# Altium PCB PCB1.PcbDoc
Units mil, origin at the board's own origin, x right, y up, seen from the top; angles counter-clockwise.
Board outline 6000 x 4000 mil, 2 copper layers (Top Layer, Bottom Layer); 48 components, 34 nets, 216 pads, 0 vias.
Unrouted connection lines stored in the file: 59.
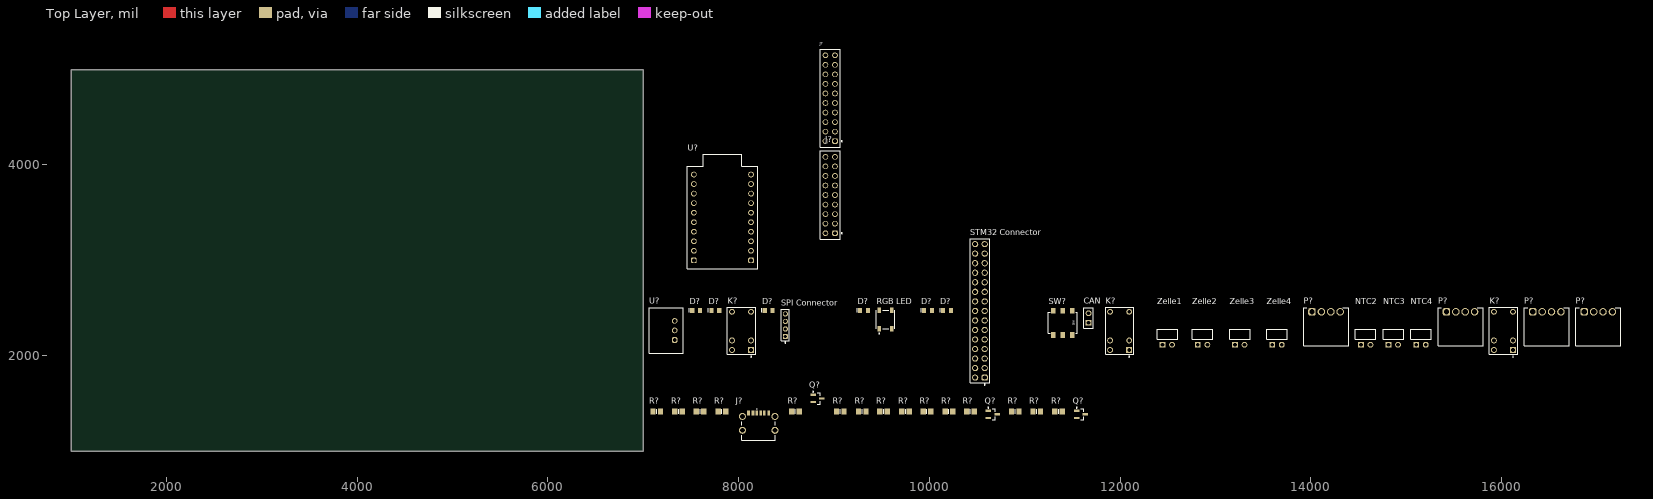
[diagram p0: Top Layer view]
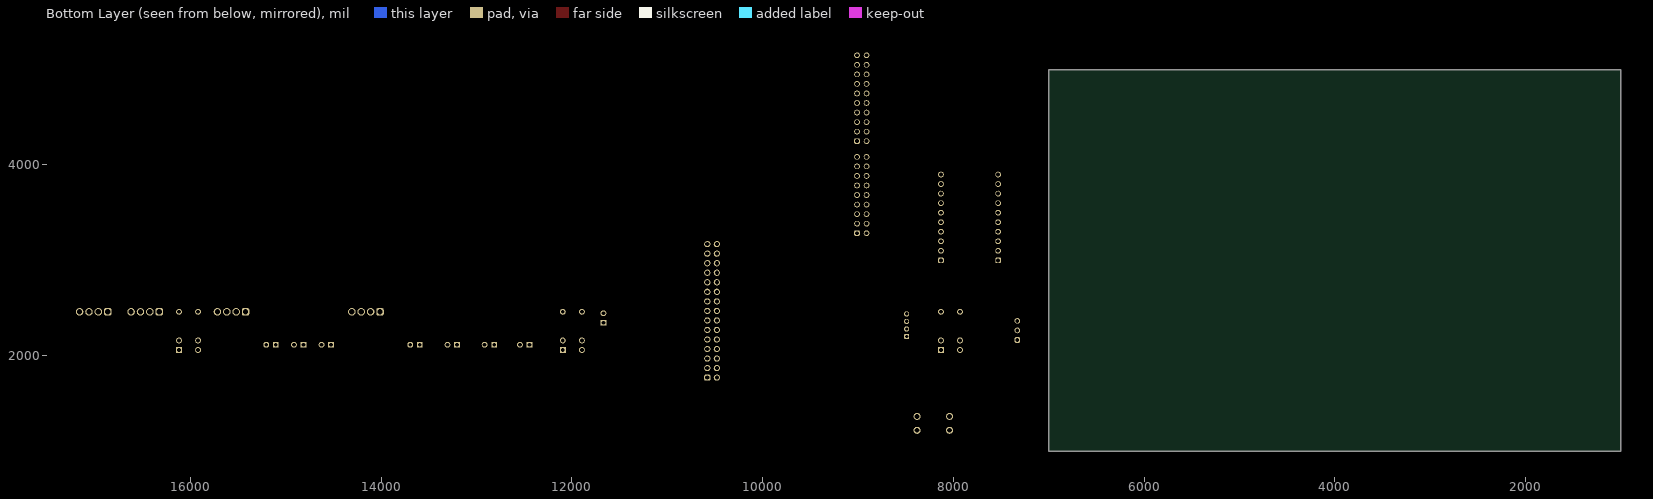
[diagram p1: Bottom Layer view, seen from below]

## Layer stack, top to bottom
Top Solder: solder mask 0.4, Solder Resist, Dk 3.5
Top Layer: signal copper 1.4
Dielectric 1: dielectric 12.6, FR-4, Dk 4.8
Bottom Layer: signal copper 1.4
Bottom Solder: solder mask 0.4, Solder Resist, Dk 3.5

## Board outline
1000,1000 7000,1000 7000,5000 1000,5000

## Design rules (kind name [scope] priority, off if disabled: settings)
Clearance [All] p1: gap=10 ignorepadtopadclearanceinfootprint=FALSE
PolygonConnect [All] p1: connectstyle=Relief reliefconductorwidth=10 reliefentries=4 polygonreliefangle="90 Angle" airgapwidth=10
RoutingVias [All] p1: holewidth=28 width=50 viastyle="Through Hole" minholewidth=28 minwidth=50 maxholewidth=28 maxwidth=50
SolderMaskExpansion [All] p1: expansion=4 istentingtop=FALSE
SupplyNets "Schematic Supply Nets_4" [InNet('3V3')] p1: voltage=0.000
SupplyNets "Schematic Supply Nets_3" [InNet('+5')] p2: voltage=0.000
SupplyNets "Schematic Supply Nets_2" [InNet('GND')] p3: voltage=0.000
SupplyNets "Schematic Supply Nets_1" [InNet('+5V')] p4: voltage=0.000
SupplyNets "Schematic Supply Nets" [InNet('+3.3V')] p5: voltage=0.000
Width [All] p1: maxlimit=10 minlimit=10 preferedwidth=10
30 further rules are at their usual default settings.

## Classes and differential pairs
component class MiniBMS: C1 C2 C3 C4 F? R1 R2 R3 R4 R5 R6 R7 R8 R9 R10 R11 R12 R13 R14 R15 R16

## Components (designator, comment, footprint, x,y, rotation, side; value= is the part's Value field where it differs from the comment)
CAN "TSW-102-26-G-S" SMTC-TSW-102-26-XX-S 11670,2345 r90 top
D? "150080AS75000" WL-SMCW_0805_150080xx75000 7755,2475 r0 top
D? "150080BS75000" WL-SMCW_0805_150080xx75000 9985,2475 r0 top
D? "150080BS75000" WL-SMCW_0805_150080xx75000 9315,2475 r0 top
D? "150080RS75000" WL-SMCW_0805_150080xx75000 8315,2475 r0 top
D? "150080BS75000" WL-SMCW_0805_150080xx75000 10185,2475 r0 top
D? "150080GS75000" WL-SMCW_0805_150080xx75000 7555,2475 r0 top
J? "61302021821" 61302021821 8960,4700 r90 top
J? "61301821821" 61301821821 8960,3685 r90 top
J? "632722100213" 632722100213 8210,1255 r0 top
K? "G5V-1-DC5" FP-G5V-1-MFG 11995,2260 r90 top
K? "G5V-1-DC5" FP-G5V-1-MFG 8030,2260 r90 top
K? "G5V-1-DC5" FP-G5V-1-MFG 16020,2260 r90 top
NTC2 "TSW-102-22-G-S-RA" SMTC-TSW-102-22-X-S-RA 14525,2115 r0 top
NTC3 "TSW-102-22-G-S-RA" SMTC-TSW-102-22-X-S-RA 14815,2115 r0 top
NTC4 "TSW-102-22-G-S-RA" SMTC-TSW-102-22-X-S-RA 15105,2115 r0 top
P? "691382010004" 691382010004 15570,2305 r0 top
P? "691382010004" 691382010004 14160,2305 r0 top
P? "691382010004" 691382010004 16475,2305 r0 top
P? "691382010004" 691382010004 17015,2305 r0 top
Q? "NMOS; 40V, 3,6A" SOT-23_M 11590,1385 r0 top
Q? "NMOS; 40V, 3,6A" SOT-23_M 8826.26,1552.4 r0 top
Q? "NMOS; 40V, 3,6A" SOT-23_M 10665,1385 r0 top
R? "Res100" 6-0805_M 11355,1415 r0 top value=100
R? "Res330,0805" 6-0805_M 9065,1415 r0 top value=330
R? "Res100" 6-0805_M 8595,1415 r0 top value=100
R? "Res100,0805" 6-0805_M 9520,1415 r0 top value=100
R? "Res5k1,0805" 6-0805_M 7140,1415 r0 top value=5k1
R? "Res10K" 6-0805_M 11125,1415 r0 top value=10K
R? "Res100,0805" 6-0805_M 9750,1415 r0 top value=100
R? "Res5" 6-0805_M 10900,1415 r0 top value=5
R? "Res100" 6-0805_M 10430,1415 r0 top value=100
R? "Res100,0805" 6-0805_M 7825,1415 r0 top value=100
R? "Res5k1,0805" 6-0805_M 7370,1415 r0 top value=5k1
R? "Res10K" 6-0805_M 9975,1415 r0 top value=10K
R? "Res10K" 6-0805_M 7595,1415 r0 top value=10K
R? "Res330,0805" 6-0805_M 9295,1415 r0 top value=330
R? "Res100,0805" 6-0805_M 10205,1415 r0 top value=100
"RGB LED" "1655" ADA-RGB-1655_V 9540,2380 r90 top
"SPI Connector" "62000411121" 62000411121 8490,2320 r90 top
"STM32 Connector" "61303021121" 61303021121 10530,2470 r90 top
SW? "452403012014" 452403012014 61400,52345 r0 top
U? "EP32_C6_Mini" ESP_C6_MINI 7830,3450 r0 top
U? "DCDC, 173010378" WPME-FDSM_SIP-3_L11.6W8.5H10.5 7240,2265 r90 top
Zelle1 "TSW-102-22-G-S-RA" SMTC-TSW-102-22-X-S-RA 12445,2115 r0 top
Zelle2 "TSW-102-22-G-S-RA" SMTC-TSW-102-22-X-S-RA 12815,2115 r0 top
Zelle3 "TSW-102-22-G-S-RA" SMTC-TSW-102-22-X-S-RA 13205,2115 r0 top
Zelle4 "TSW-102-22-G-S-RA" SMTC-TSW-102-22-X-S-RA 13595,2115 r0 top

## Footprints (in the part's own frame and the unit in brackets; to place one, negate y for a bottom-side part, rotate by r counter-clockwise, add the part's x,y. Pads: shape width x height; smd on the part's side, far side on the other; paste and mask are expansions set on the pad)
6-0805_M [mm] "Chip Resistor, Body 2.0x1.2mm, IPC Low Density"
  rect 1.4x1.5 smd: 1(-1,0) 2(1,0)
  silkscreen extent 0,-0.65 0,0.65, body extent -1.07,-0.7 1.07,0.7, height 0.7
61301821821 [mm] "Socket Header, Pitch 2.54 mm, THT, Vertical, dual row, 18p"
  rrect50% 1.5x1.5 hole 1.02: 1(-10.16,-1.27)
  round 1.5 hole 1.02: 2(-10.16,1.27) 3(-7.62,-1.27) 4(-7.62,1.27) 5(-5.08,-1.27) 6(-5.08,1.27) 7(-2.54,-1.27) 8(-2.54,1.27) 9(0,-1.27) 10(0,1.27) 11(2.54,-1.27) 12(2.54,1.27) 13(5.08,-1.27) 14(5.08,1.27) 15(7.62,-1.27) 16(7.62,1.27) 17(10.16,-1.27) 18(10.16,1.27)
  silkscreen extent -11.81,-3.22 11.81,2.62, body extent -11.68,-2.54 11.68,2.54, height 8.45
61302021821 [mm] "Socket Header, Pitch 2.54 mm, THT, Vertical, dual row, 20p"
  rrect50% 1.5x1.5 hole 1.02: 1(-11.43,-1.27)
  round 1.5 hole 1.02: 2(-11.43,1.27) 3(-8.89,-1.27) 4(-8.89,1.27) 5(-6.35,-1.27) 6(-6.35,1.27) 7(-3.81,-1.27) 8(-3.81,1.27) 9(-1.27,-1.27) 10(-1.27,1.27) 11(1.27,-1.27) 12(1.27,1.27) 13(3.81,-1.27) 14(3.81,1.27) 15(6.35,-1.27) 16(6.35,1.27) 17(8.89,-1.27) 18(8.89,1.27) 19(11.43,-1.27) 20(11.43,1.27)
  silkscreen extent -13.08,-3.22 13.08,2.62, body extent -12.95,-2.54 12.95,2.54, height 8.45
61303021121 [mm] "Pin Header, pitch 2.54 mm, THT, Vertical, dual row, 30p"
  rrect50% 1.65x1.65 hole 1.1: 1(-17.78,-1.27)
  round 1.65 hole 1.1: 2(-17.78,1.27) 3(-15.24,-1.27) 4(-15.24,1.27) 5(-12.7,-1.27) 6(-12.7,1.27) 7(-10.16,-1.27) 8(-10.16,1.27) 9(-7.62,-1.27) 10(-7.62,1.27) 11(-5.08,-1.27) 12(-5.08,1.27) 13(-2.54,-1.27) 14(-2.54,1.27) 15(0,-1.27) 16(0,1.27) 17(2.54,-1.27) 18(2.54,1.27) 19(5.08,-1.27) 20(5.08,1.27) 21(7.62,-1.27) 22(7.62,1.27) 23(10.16,-1.27) 24(10.16,1.27) 25(12.7,-1.27) 26(12.7,1.27) 27(15.24,-1.27) 28(15.24,1.27) 29(17.78,-1.27) 30(17.78,1.27)
  silkscreen extent -19.78,-2.62 19.2,2.62, body extent -19.05,-2.54 19.05,2.54, height 8.59
62000411121 [mm] "Pin Header, pitch 2.00 mm, THT, Vertical, single row, 4p"
  rrect50% 1.4x1.4 hole 0.9: 1(-3,0)
  round 1.4 hole 0.9: 2(-1,0) 3(1,0) 4(3,0)
  silkscreen extent -4.77,-1.07 4.2,1.07, body extent -4,-1 4,1, height 6.05
452403012014 [mm] "SMT Mini Slide Switch, Same Side Connection"
  rect 1.2x1.5 smd: 1(-1272.5,-1266.75) 2(-1270,-1266.75) 3(-1267.5,-1266.75) 4(-1272.5,-1273.25) 5(-1270,-1273.25) 6(-1267.5,-1273.25)
  silkscreen extent -1273.85,-1272.75 -1266.15,-1267.25, body extent -1273.85,-1273.75 -1266.15,-1266.25, height 3.48
632722100213 [mm]
  round 1.875 hole 1.25: 1(4.32,2.75) 2(-4.32,2.75) 3(4.32,-0.95) 4(-4.32,-0.95)
  rect 0.7x1.4 smd: A5(-0.5,3.65) A9(1.5,3.65) A12(2.7,3.65) B5(0.5,3.65) B9(-1.5,3.65) B12(-2.7,3.65)
  silkscreen extent -4.47,-3.65 4.47,4.8, body extent -4.84,-3.65 4.84,4.28, height 3.38
691382010004 [mm] "Horizontal PCB Header, pitch 2.5mm, 04p"
  rrect50% 2x2 hole 1.4: 1(-3.75,3.95)
  round 2 hole 1.4: 2(-1.25,3.95) 3(1.25,3.95) 4(3.75,3.95)
  silkscreen extent -6,-5.05 6,5.05, body extent -6,-5.05 6,5.05, height 8.15
ADA-RGB-1655_V [mm] "SMD, 4-Leads, Body 5x5mm"
  rect 1.5x0.9 smd: 1(-2.45,1.65) 2(-2.45,-1.65) 3(2.45,-1.65) 4(2.45,1.65)
  silkscreen extent -3.87,-2.5 2.5,2.5, body extent -2.7,-2.5 2.7,2.5, height 1.68
ESP_C6_MINI [mm]
  round 1.52 hole 1.02: 0(-7.62,6.35) 1(-7.62,3.81) 2(-7.62,1.27) 3(-7.62,-1.27) 3V3(7.62,6.35) 4(-7.62,-3.81) 5(-7.62,-6.35) 5V(7.62,11.43) 6(-7.62,-8.89) 9(7.62,-8.89) 14(7.62,-6.35) 15(7.62,-3.81) 18(7.62,-1.27) 19(7.62,1.27) 20(7.62,3.81) GND(7.62,8.89) RX(-7.62,8.89) TX(-7.62,11.43)
  rrect50% 1.52x1.52 hole 1.02: 7(-7.62,-11.43) 8(7.62,-11.43)
  silkscreen extent -9.4,-13.72 9.4,16.85, body extent -8.87,-12.95 8.87,12.95, height 8.55
FP-G5V-1-MFG [mm]
  rect 1.55x1.55 hole 1 paste-2539.97 mask+0: 1(-5.08,-2.54)
  round 1.55 hole 1 paste-2539.97 mask+0: 2(-2.54,-2.54) 5(5.08,-2.54) 6(5.08,2.54) 9(-2.54,2.54) 10(-5.08,2.54)
  silkscreen extent -6.97,-3.75 6.25,3.75, body extent -6.35,-3.85 6.35,3.85, height 0.25
SMTC-TSW-102-22-X-S-RA [mm] ".025 SQ Post Terminal Strip Assembly, 1x2 Pins, Right Angle, 2.54mm Pitch, Male"
  rect 1.55x1.55 hole 1.02: 1(0,0)
  round 1.55 hole 1.02: 2(2.54,0)
  silkscreen extent -1.46,1.52 4,4.06, body extent -1.27,-0.32 3.81,9.9, height 3.05
SMTC-TSW-102-26-XX-S [mm] ".025 SQ Post Terminal Strip Assembly, 1x2 Pins, Vertical, 2.54mm Pitch, Male"
  rect 1.55x1.55 hole 1.02: 1(0,0)
  round 1.55 hole 1.02: 2(2.54,0)
  silkscreen extent -1.46,-1.27 4,1.27, body extent -1.4,-1.27 3.81,1.27, height 8.38
SOT-23_M [mm] "SOT23, 3-Leads, Body 2.9x1.3mm, Pitch 0.95mm, Lead Span 2.5mm, IPC Low Density"
  rect 1.45x0.6 smd: 1(-1.175,0.95) 2(-1.175,-0.95) 3(1.175,0)
  silkscreen extent -1.3,-1.5 0.7,1.92, body extent -0.7,-1.5 0.7,1.5, height 1.1
WL-SMCW_0805_150080xx75000 [mm] "SMD Mono-color Chip LED, body 2.0x1.25mm"
  rect 1.1x1.3 smd: 1(-1.05,0) 2(1.05,0)
  silkscreen extent -2,-0.6 -1.8,0.6, body extent -1,-0.63 1,0.62, height 0.7
WPME-FDSM_SIP-3_L11.6W8.5H10.5 [mm] "Fixed Step Down Regulator Module, SIP-3, body 11.60x8.50mm"
  rrect50% 1.5x1.5 hole 1: 1(-2.54,-2.25)
  round 1.5 hole 1: 2(0,-2.25) 3(2.54,-2.25)
  silkscreen extent -6.05,-4.5 6.05,4.5, body extent -5.8,-4.26 5.8,4.25, height 10.55

## Part data
CAN: library part CMP-1024-00327-1, "0.025\" SQ Post Header, Through-hole, Vertical, -55 to 125 degC, 2.54 mm Pitch, 2-Pin, Male, RoHS", Manufacturer=Samtec, Temperature Range="-55 to 125 degC", ComponentLink1Description="Manufacturer URL", ComponentLink1URL=http://www.samtec.com, ComponentLink2Description=Datasheet, ComponentLink2URL=http://www.samtec.com/documents/webfiles/pdf/TSW_TH.PDF, ComponentLink3Description="Package Specification", ComponentLink3URL=http://www.samtec.com/documents/webfiles/cpdf/TSW-XXX-XX-XXX-X-XX-XXX-MKT.pdf, DatasheetVersion=F-214, Mounting Technology=Through-hole, Orientation=Vertical, PackageDescription=".025[0.64] SQ. Post Terminal Strip Assembly", PackageReference=TSW-102-26-XX-S, PackageVersion="DM, 8/1988", PartNumber=TSW-102-26-G-S, Pitch="2.54 mm", RoHS=True
D?: library part CMP-03913-89970695-1, "150080AS75000 WL-SMCW SMT Mono-Color Chip LED Waterclear", Forward Current=100mA, Forward Voltage=2V, Max Operating Temperature=85°C, Max Reverse Voltage (DC)=5V, Min Operating Temperature=-40°C, Dominant Wavelength=605nm, Luminous Intensity=130mcd, NexarPartId=89970695, Packaging="Tape and Reel", Peak Wavelength=610nm, RoHS=Compliant, Viewing Angle=140°, Wavelength=605nm
D? D? D?: library part CMP-1426-00008-6, Case Code (Imperial)=0805, Case Code (Metric)=2012, Color=Blue, Forward Current=100mA, Forward Voltage=3.2V, Max Junction Temperature (Tj)=95°C, Max Operating Temperature=85°C, Max Reverse Voltage (DC)=5V, Min Operating Temperature=-40°C, Power Dissipation=105mW, Test Current=20mA, Case/Package=0805, Dominant Wavelength=470nm, Height=700µm, Lead Free="Lead Free", Length=2mm, Lens Style="Clear, Rectangular", Luminous Intensity=145mcd, Mount="Surface Mount", NexarPartId=29717779, Packaging="Tape and Reel", Peak Wavelength=465nm, REACH SVHC=Unknown, Reverse Voltage=5V, RoHS=Compliant, Viewing Angle=140°, Wavelength=470nm, Width=1.25mm
D?: library part CMP-1426-00011-3, "LED Uni-Color Red 630nm 2-Pin Chip 0805(2012Metric) T/R", Case Code (Imperial)=0805, Case Code (Metric)=2012, Color=Red, Forward Current=100mA, Forward Voltage=2V, Max Junction Temperature (Tj)=95°C, Max Operating Temperature=85°C, Max Reverse Voltage (DC)=5V, Min Operating Temperature=-40°C, Power Dissipation=72mW, Test Current=20mA, Case/Package=0805, Dominant Wavelength=625nm, Height=700µm, Length=2mm, Lens Style="Clear, Rectangular", Luminous Intensity=150mcd, Mount="Surface Mount", Packaging="Tape and Reel", Peak Wavelength=630nm, REACH SVHC=Unknown, RoHS=Compliant, Viewing Angle=140°, Wavelength=625nm, Width=1.25mm
D?: library part CMP-1426-00007-2, Case Code (Imperial)=0805, Case Code (Metric)=2012, Color=Green, Forward Current=100mA, Forward Voltage=3.2V, Max Junction Temperature (Tj)=95°C, Max Operating Temperature=85°C, Max Reverse Voltage (DC)=5V, Min Operating Temperature=-40°C, Power Dissipation=105mW, Test Current=20mA, Case/Package=0805, Dominant Wavelength=525nm, Height=700µm, Length=2mm, Lens Style="Clear, Rectangular", Luminous Intensity=450mcd, Mount="Surface Mount", NexarPartId=29717780, Packaging="Tape and Reel", Peak Wavelength=515nm, REACH SVHC=Unknown, Reverse Voltage=5V, RoHS=Compliant, Viewing Angle=140°, Wavelength=520nm, Width=1.25mm
J?: library part CMP-1502-01350-3, Contact Resistance=20mΩ, Current Rating=3A, Operating Supply Voltage=250V, Gender=Female, Lead Pitch=2.54mm, NexarPartId=61924746, Number of Pins=20, Orientation=Vertical, RoHS=Non-Compliant
J?: library part CMP-1502-01347-3, Contact Resistance=20mΩ, Current Rating=3A, Operating Supply Voltage=250V, Gender=Female, Lead Pitch=2.54mm, NexarPartId=61924743, Number of Pins=18, Orientation=Vertical, RoHS=Non-Compliant
J?: "Connector", Manufacturer_Name="Wurth Elektronik", Datasheet Link=https://www.we-online.com/components/products/datasheet/632722100213.pdf, Height=3.28mm, Manufacturer_Part_Number=632722100213
K? K? K?: library part CMP-2000-05293-2, "RELAY GEN PURPOSE SPDT 1A 5VDC", Ambient Temperature Range High=+70°C, Ambient Temperature Range Low=-40°C, Coil Current=30mA, Coil Power=150mW, Coil Resistance=167Ω, Coil Voltage=5V, Current Rating=2A, Manufacturer=Omron, Package=G5V-1, Switching Current=1A, Temperature="-40°C to +70°C", Automotive=No, Category=Relay, Coil Type=Non-Latching, ComponentLink2Description=Datasheet, ComponentLink2URL=https://omronfs.omron.com/en_US/ecb/products/pdf/en-g5v_1.pdf, Device Class L1=Electromechanical, Device Class L2=Relays, Device Class L3="Signal Relays", Digikey Description="RELAY GEN PURPOSE SPDT 1A 5VDC", Height=10mm, Lead Free=Yes, Manufacturer Part Number=G5V-1-DC5, Number of Contacts=1, Octopart=https://octopart.com/g5v-1-dc5-omron-6846, RoHS=TRUE, Standoff Height=0.5mm, Temperature Range High=+70°C, Temperature Range Low=-40°C, Throw Configuration=SPDT
NTC2 NTC3 NTC4 Zelle1 Zelle2 Zelle3 Zelle4: library part CMP-1024-00323-1, "0.025\" SQ Post Header, Through-hole, Right Angle, -55 to 125 degC, 2.54 mm Pitch, 2-Pin, Male, RoHS", Manufacturer=Samtec, Temperature Range="-55 to 125 degC", ComponentLink1Description="Manufacturer URL", ComponentLink1URL=http://www.samtec.com, ComponentLink2Description=Datasheet, ComponentLink2URL=http://www.samtec.com/documents/webfiles/pdf/TSW_TH.PDF, ComponentLink3Description="Package Specification", ComponentLink3URL=http://www.samtec.com/documents/webfiles/cpdf/TSW-XXX-XX-XXX-X-XX-XXX-MKT.pdf, DatasheetVersion=F-214, Mounting Technology=Through-hole, Orientation="Right Angle", PackageDescription=".025[0.64] SQ. Post Terminal Strip Assembly", PackageReference=TSW-102-22-X-S-RA, PackageVersion="DM, 8/1988", PartNumber=TSW-102-22-G-S-RA, Pitch="2.54 mm", RoHS=True
P? P? P? P?: library part CMP-1502-01745-2, Color=Green, Current=12A, Max Operating Temperature=105°C, Min Operating Temperature=-40°C, Voltage=300V, Contact Plating=Tin, Gender=Male, Lead Pitch=2.5mm, Mount="Through Hole", NexarPartId=52676066, Number of Levels=1, Number of Pins=4, Number of Positions=4, Number of Positions Per Level=4, Packaging=Box, Pitch=2.4892mm, RoHS=Compliant, Termination=Solder
Q? Q? Q?: library part MOSFET-N, "N-Channel MOSFET", LatestRevisionDate=17-Jul-2002, LatestRevisionNote="Re-released for DXP Platform.", PackageDescription="TO, Flat Index; 3 In-Line, Axial Leads; Body Dia. 4.6mm; Lead Dia. 0.5 mm (max)", PackageReference=E3, PackageVersion=1995/1996, Published=8-Jun-2000, Publisher="Altium Limited"
R? R? R? R? R? R? R? R? R? R? R? R? R? R? R?: library part Res2, "Resistor", LatestRevisionDate=17-Jul-2002, LatestRevisionNote="Re-released for DXP Platform.", PackageDescription="Axial Device, Thru-Hole; 2 Leads; 0.4 in Pin Spacing", PackageReference=AXIAL-0.4, Published=8-Jun-2000, Publisher="Altium Limited"
"RGB LED": library part CMP-2000-05026-1, "Intelligent Control LED Integrated Light Source, 3.5 to 5.3 V, -25 to 80 degC, 4-Pin SMD, RoHS, Tape and Reel", Color=Red,Green,Blue(RGB), Manufacturer=Adafruit-Industries-LLC, Package Description="4-Pin Surface Mount Device, Body 5 x 5 mm", Category=Optoelectronics, Configuration=Discrete, Controller Type=-, Datasheet URL=http://datasheet.octopart.com/ADA1655-Adafruit-Industries-datasheet-32028139.pdf, Datasheet Version=May-13, Family=Addressable,Specialty, Interface=-, Manufacturer URL=https://www.adafruit.com/, Mounting Type=SurfaceMount, Number of LEDs=10, Package Reference=1655, Series=Neopixel, Size / Dimension=5.00mmLx5.00mmW, Utilized LED=WS2812(5050)
"SPI Connector": library part CMP-1502-00958-3, Contact Resistance=20mΩ, Current Rating=2A, Operating Supply Voltage=200V, Gender=Male, Lead Pitch=2mm, NexarPartId=61924780, Number of Pins=4, Orientation=Vertical, RoHS=Non-Compliant
"STM32 Connector": library part CMP-1502-01116-3, Color=Black, Contact Resistance=20mΩ, Current Rating=3A, Operating Supply Voltage=250V, Connector Type="Male Pin", Contact Material=Copper, Contact Mating Length=5.9944mm, Contact Plating=Gold, Gender=Male, Lead Pitch=2.54mm, Mount="Through Hole", NexarPartId=32855567, Number of Contacts=30, Number of Pins=30, Number of Positions=30, Number of Rows=2, Orientation=Vertical, Packaging=Bulk, Pitch=2.54mm, REACH SVHC=Unknown, RoHS=Compliant, Row Spacing=2.54mm, Termination=Solder
SW?: library part CMP-03913-71472420-1, "452403012014 Slide Switch, Dpdt, 0.3A, 6Vdc, Smd Rohs Compliant: Yes", Color=Silver, Current Rating=300mA, Insulation Resistance=100MΩ, Max Operating Temperature=85°C, Min Operating Temperature=-40°C, Voltage Rating=6V, Actuator Length=1.2mm, Actuator Material="Liquid Crystal Polymer, Polymer", Contact Plating=Silver, Contact Style=Non-Shorting, Mount="Surface Mount", NexarPartId=71472420, Packaging="Tape and Reel", RoHS=Compliant, Switch Function=On-On, Switch Travel=2mm, Termination=SMD/SMT, Throw Configuration=DPDT, Voltage Rating (DC)=6V
U?: library part CMP-03913-70856726-1, "173010378 WPME-FDSM Fixed Step Down Regulator Module", Case/Package=Module, Max Input Voltage=28V, Max Operating Temperature=85°C, Max Output Current=1A, Max Output Voltage=3.3V, Max Power Dissipation=3W, Max Switching Frequency=300kHz, Min Input Voltage=7V, Min Operating Temperature=-40°C, Output Power=3.3W, Efficiency=87%, Features="OCP, OTP, OVP, SCP", Height=10.5mm, Length=11.6mm, Mount="Through Hole", NexarPartId=70856726, Nominal Output Voltage=3.3V, Number of Outputs=1, Number of Pins=3, Output Current=1A, Output Type=Fixed, Output Voltage=3.3V, REACH SVHC=Unknown, RoHS=Compliant, Switching Frequency=300kHz, Voltage - Output 1=3.3V, Width=8.5mm

## Nets (pads, with @x,y where several pads share a name; then routed paths per layer and width w, separated by ;. In a path a pad name is that pad's centre, name@x,y a point inside that pad or via, vN(x,y) a via of type N, cw(c..) or ccw(c..) an arc to the next point about the centre after c; other vN are vias at no path point)
+3.3V: "STM32 Connector.3" U?.3@7328.58,2365
+5V: "RGB LED.1" "STM32 Connector.5" K?.9 SW?.4 U?.1@7328.58,2165
GND: "RGB LED.3" "STM32 Connector.1" D?.1 J?.1@8380.08,1363.27 J?.2@8039.92,1363.27 J?.3@8380.08,1217.6 J?.4@8039.92,1217.6 J?.A12 J?.B12 NTC2.1 NTC3.1 NTC4.1 P?.2@16965.79,2460.51 Q?.2 R?.1@7555.63,1415 R?.1@9935.63,1415 R?.1@11085.63,1415 R?.1@11315.63,1415 R?.2@7179.37,1415 R?.2@7409.37,1415 U?.2@7328.58,2265 Zelle1.1
NetC1_2: "STM32 Connector.11"
NetC2_2: "STM32 Connector.7"
NetC3_2: "STM32 Connector.9"
NetC4_2: "STM32 Connector.13"
NetCAN_1: "STM32 Connector.4" CAN.1
NetCAN_2: "STM32 Connector.2" CAN.2
NetD?_2: D?.2@7596.34,2475 R?.2@7864.37,1415
NetF?_1: J?.A9 J?.B9
NetJ?_A5: J?.A5 R?.1@7100.63,1415
NetJ?_B5: J?.B5 R?.1@7330.63,1415
NetK?_2: K?.2@12095,2160 Q?.3@10711.26,1385
NetK?_5: K?.5@12095,2460 K?.6@11895,2460
NetK?_10: K?.10@7930,2060 K?.10@15920,2060 R?.1@10860.63,1415 R?.2@11394.37,1415
NetNTC2_2: NTC2.2
NetNTC3_2: NTC3.2
NetNTC4_2: NTC4.2
NetP?_1: P?.1@16867.36,2460.51
NetQ?_1: Q?.1@10618.74,1422.4 R?.1@10390.63,1415
NetR9_1: "STM32 Connector.15"
NetR9_2: Zelle1.2 Zelle2.1
NetR10_1: "STM32 Connector.17"
NetR10_2: Zelle2.2 Zelle3.1
NetR11_1: "STM32 Connector.19"
NetR11_2: Zelle3.2 Zelle4.1
NetR12_1: "STM32 Connector.21"
NetR12_2: R?.2@10939.37,1415 Zelle4.2
NetR?_1: R?.1@9480.63,1415 R?.2@10014.37,1415 R?.2@10469.37,1415
"NetRGB LED_4": "RGB LED.4" "STM32 Connector.23"
"NetSPI Connector_1": "SPI Connector.1" "STM32 Connector.30"
"NetSPI Connector_2": "SPI Connector.2" "SPI Connector.3" "STM32 Connector.26" "STM32 Connector.28"
"NetSPI Connector_4": "SPI Connector.4" "STM32 Connector.24"
pads on no net: "RGB LED.2" "STM32 Connector.6" "STM32 Connector.8" "STM32 Connector.10" "STM32 Connector.12" "STM32 Connector.14" "STM32 Connector.16" "STM32 Connector.18" "STM32 Connector.20" "STM32 Connector.22" "STM32 Connector.25" "STM32 Connector.27" "STM32 Connector.29" D?.2@7796.34,2475 D?.2@8356.34,2475 D?.2@9356.34,2475 D?.2@10026.34,2475 D?.2@10226.34,2475 J?.1@9010,3285 J?.1@9010,4250 J?.2@8910,3285 J?.2@8910,4250 J?.3@9010,3385 J?.3@9010,4350 J?.4@8910,3385 J?.4@8910,4350 J?.5 J?.6 J?.7 J?.8 J?.9 J?.10 J?.11 J?.12 J?.13 J?.14 J?.15 J?.16 J?.17 J?.18 J?.19 J?.20 K?.1 K?.2@8130,2160 K?.2@16120,2160 K?.5@8130,2460 K?.5@16120,2460 K?.6@7930,2460 K?.6@15920,2460 K?.10@11895,2060 P?.1@14012.36,2460.51 P?.1@15422.36,2460.51 P?.1@16327.36,2460.51 P?.2@14110.79,2460.51 P?.2@15520.79,2460.51 P?.2@16425.79,2460.51 P?.3 P?.4 Q?.1@8780,1589.8 Q?.1@11543.74,1422.4 Q?.3@8872.52,1552.4 Q?.3@11636.26,1385 R?.1@7785.63,1415 R?.1@8555.63,1415 R?.1@9025.63,1415 R?.1@9255.63,1415 R?.1@9710.63,1415 R?.1@10165.63,1415 R?.2@7634.37,1415 R?.2@8634.37,1415 R?.2@9104.37,1415 R?.2@9334.37,1415 R?.2@9559.37,1415 R?.2@9789.37,1415 R?.2@10244.37,1415 R?.2@11164.37,1415 SW?.1 SW?.2 SW?.3 SW?.5 SW?.6 U?.0 U?.1@7530,3600 U?.2@7530,3500 U?.3@7530,3400 U?.3V3 U?.4 U?.5 U?.5V U?.6 U?.7 U?.8 U?.9 U?.14 U?.15 U?.18 U?.19 U?.20 U?.GND U?.RX U?.TX

## Text inside footprints (layer, text, board x,y; h text height)
SW?: Top Overlay "WE" at 11490.55,2372.56 h40 r270; Top Component Outline "WE" at 11490.55,2372.56 h40 r270